# Altium PCB VTG-Ctrl.PcbDoc (part 2 of 2)
Units mm, origin at the board's own origin, x right, y up, seen from the top; angles counter-clockwise.
Board outline 101 x 82 mm, 12 copper layers (Top, Layer 1, Layer 2, Layer 3, Layer 4, Layer 5, Layer 6, Layer 7, Layer 8, Layer 9, Layer 10, Bottom), stack 1.92 mm thick; 171 components, 102 nets, 650 pads, 12 vias.
Unrouted connection lines stored in the file: 291.
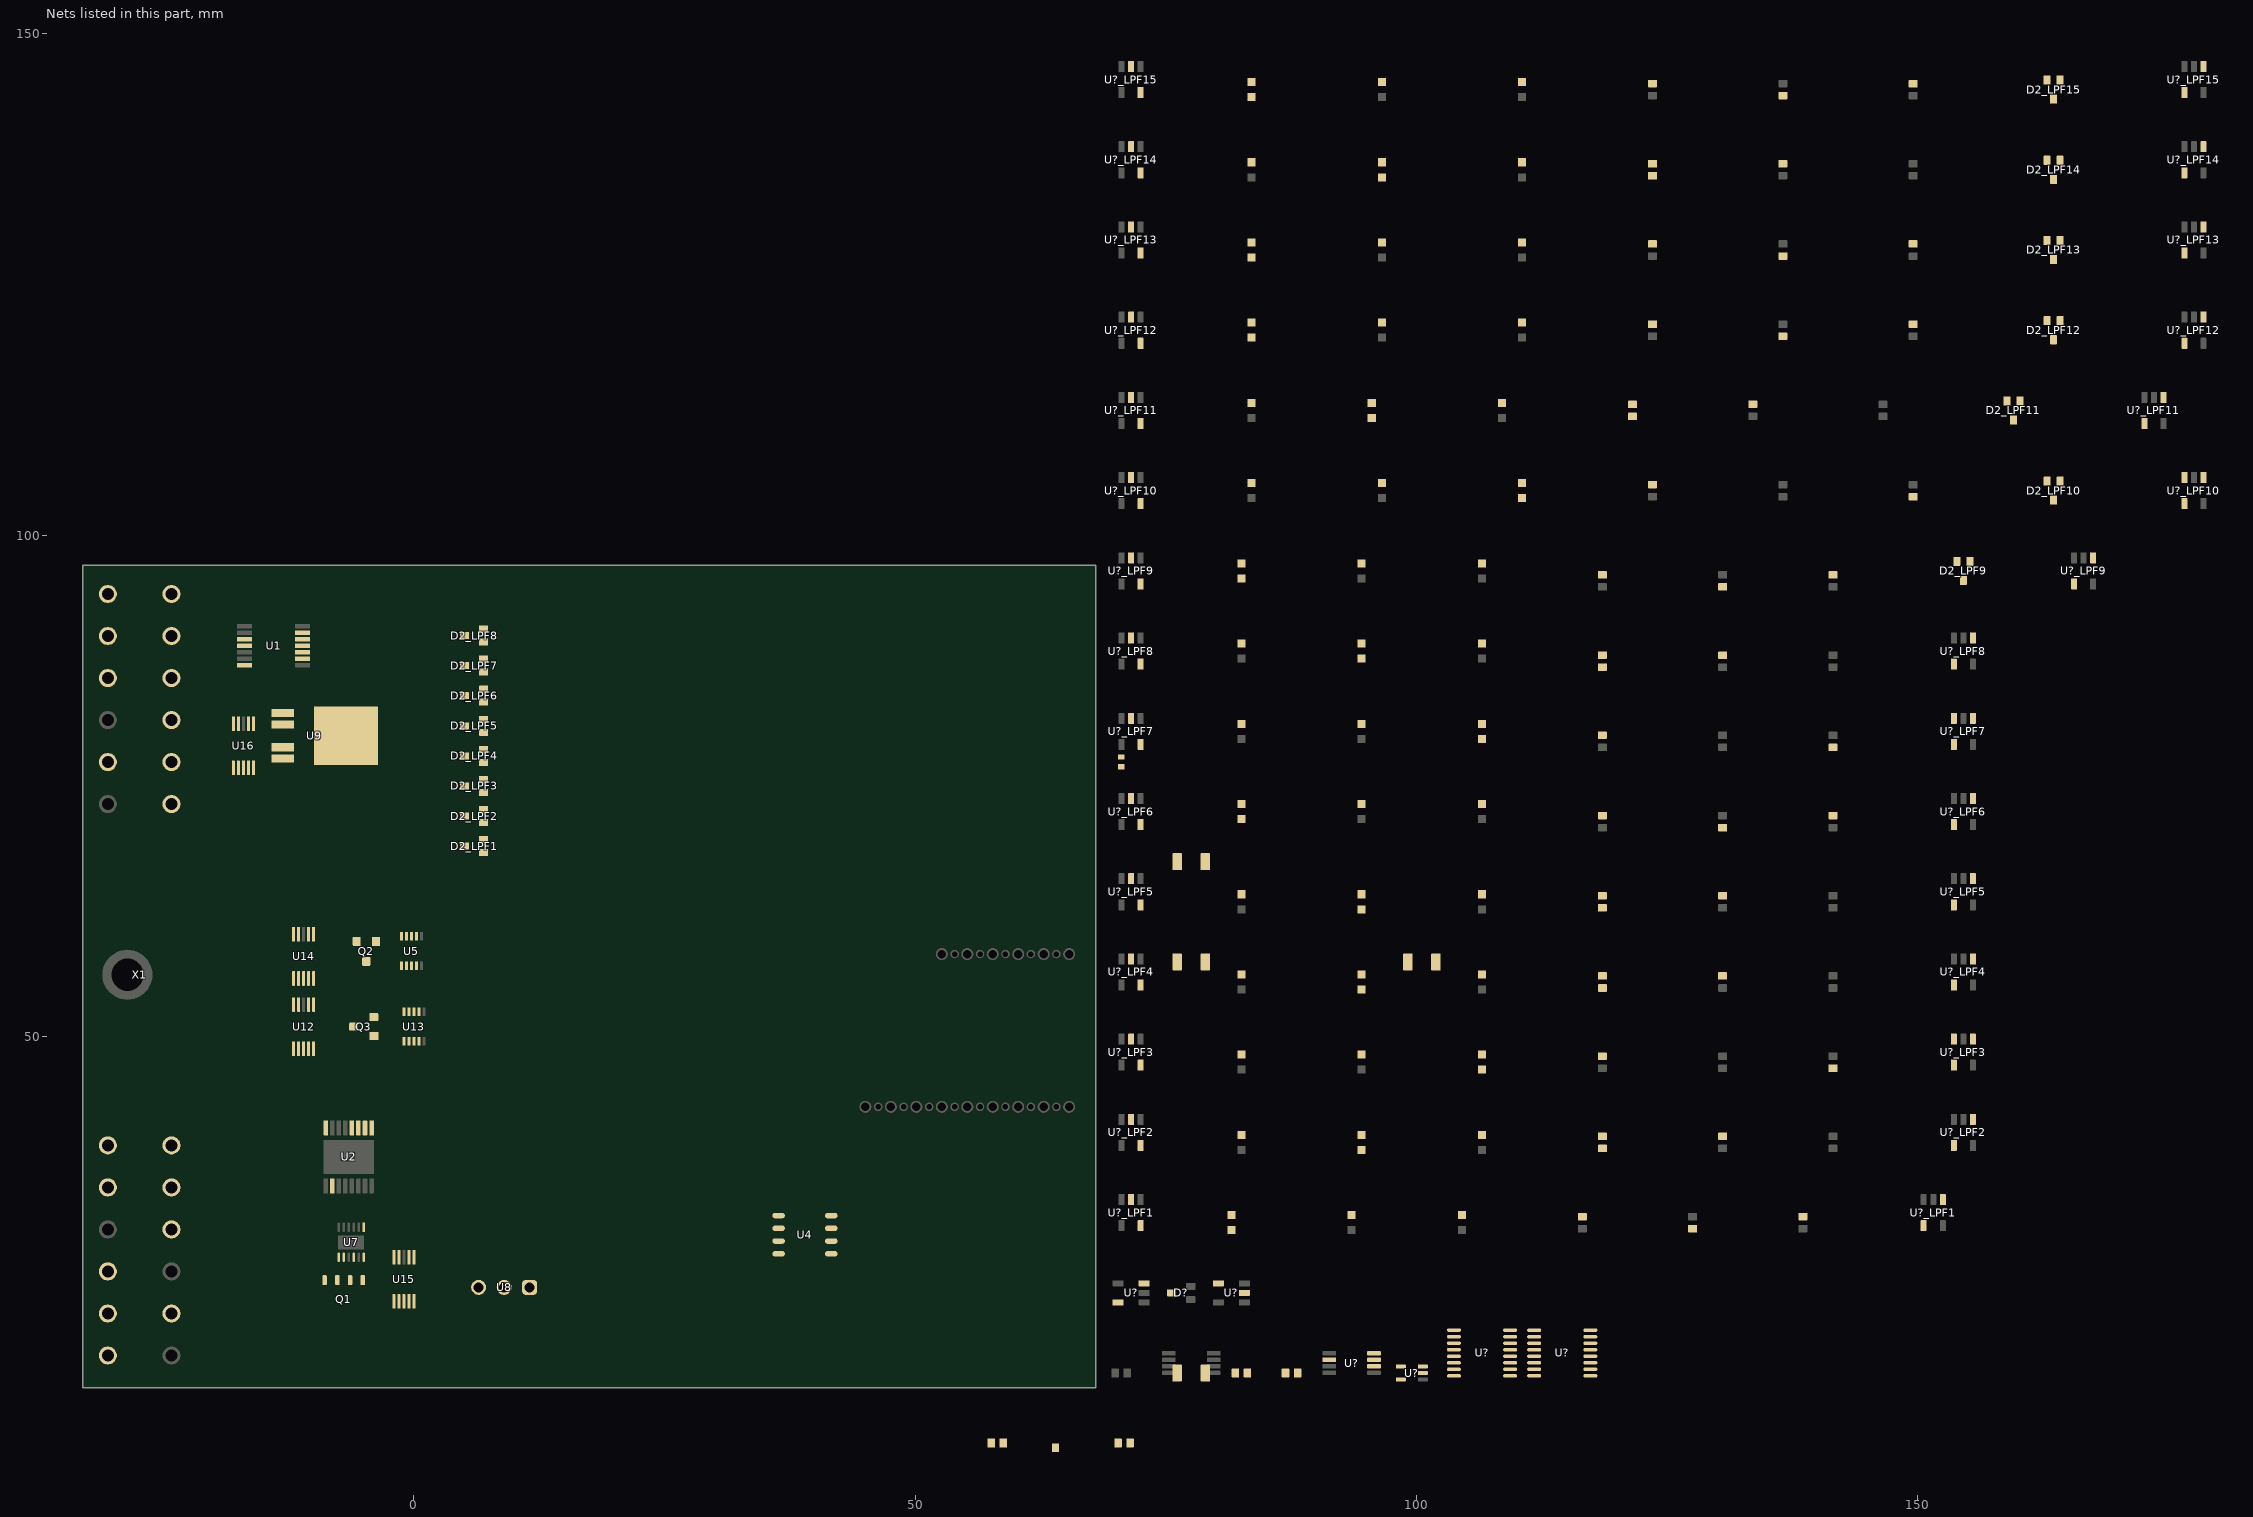
[diagram p2: the nets of this part, all layers, seen from the top]

## Part data
C?_LPF1 C?_LPF1 C?_LPF2 C?_LPF2 C?_LPF3 C?_LPF3 C?_LPF4 C?_LPF4 C?_LPF5 C?_LPF5 C?_LPF6 C?_LPF6 C?_LPF7 C?_LPF7 C?_LPF8 C?_LPF8 C?_LPF9 C?_LPF9 C?_LPF10 C?_LPF10 C?_LPF11 C?_LPF11 C?_LPF12 C?_LPF12 C?_LPF13 C?_LPF13 C?_LPF14 C?_LPF14 C?_LPF15 C?_LPF15: library part CMP-001-00738-4, "WCAP-CSGP Multilayer Ceramic Chip Capacitor, General Purpose, size 0603, X7R, 22nF, 25VDC", Capacitance Tolerance=+/-10%, Case/Package=0603, Insulation Resistance=10GO, Manufacturer="Wurth Elektronik", Operating Temperature Max=125°C, Operating Temperature Min=-55°C, Rated Voltage (DC)=25V, Category="Multilayer Ceramic Chip Capacitors", Ceramic Type=X7R, Component Type=Standard, ComponentLink1Description="Website Link", ComponentLink1URL=https://www.we-online.com/redexpert/article/885012206067?ad, ComponentLink2Description="Datasheet Link", ComponentLink2URL=https://www.we-online.com/redexpert/spec/885012206067?ad, Design Item ID=885012206067, Dissipation Factor=3.5%, Height=0.8mm, Length=1.6mm, Manufacturer Part Number=885012206067, Match Code=WCAP-CSGP, Mount="Surface Mount", Packaging="Tape and Reel", Pins=2, Source=WCAP-CSGP.SchLib, Technical Reference=X7R0603223K025DFCT10000, Width=0.8mm
C?_LPF1 C?_LPF2 C?_LPF3 C?_LPF4 C?_LPF5 C?_LPF6 C?_LPF7 C?_LPF8 C?_LPF9 C?_LPF10 C?_LPF11 C?_LPF12 C?_LPF13 C?_LPF14 C?_LPF15: library part CMP-001-00736-4, "WCAP-CSGP Multilayer Ceramic Chip Capacitor, General Purpose, size 0603, X7R, 10nF, 25VDC", Capacitance Tolerance=+/-10%, Case/Package=0603, Insulation Resistance=10GO, Manufacturer="Wurth Elektronik", Operating Temperature Max=125°C, Operating Temperature Min=-55°C, Rated Voltage (DC)=25V, Category="Multilayer Ceramic Chip Capacitors", Ceramic Type=X7R, Component Type=Standard, ComponentLink1Description="Website Link", ComponentLink1URL=https://www.we-online.com/redexpert/article/885012206065?ad, ComponentLink2Description="Datasheet Link", ComponentLink2URL=https://www.we-online.com/redexpert/spec/885012206065?ad, Design Item ID=885012206065, Dissipation Factor=3.5%, Height=0.8mm, Length=1.6mm, Manufacturer Part Number=885012206065, Match Code=WCAP-CSGP, Mount="Surface Mount", Packaging="Tape and Reel", Pins=2, Source=WCAP-CSGP.SchLib, Technical Reference=X7R0603103K025DFCT10000, Width=0.8mm
D1: library part CMP-004-00025-A01, "Vishay - 5A, 60V Schottky diode, DFN3820A, DO-220AA compatible", Case/Package=DFN3820A, Forward Current=5A, Forward Voltage=430mV, Operating Temperature (Max)=175°C, Operating Temperature (Min)=-40°C, Peak Reverse Voltage=60V, Mounting Technology=SMD, Pins=2, RoHS Compliant=Yes
D2_LPF1 D2_LPF2 D2_LPF3 D2_LPF4 D2_LPF5 D2_LPF6 D2_LPF7 D2_LPF8 D2_LPF9 D2_LPF10 D2_LPF11 D2_LPF12 D2_LPF13 D2_LPF14 D2_LPF15 D?: library part CMP-004-00031-7, "Rectifier Diode, Schottky, 2 Element, 0.2A, 30V V(RRM), Silicon", Case/Package=SOT-323, Forward Current=200mA, Forward Voltage=220mV, Operating Temperature (Max)=125°C, Operating Temperature (Min)=-55°C, Peak Reverse Voltage=30V, Mounting Technology=SMD, Pins=3, RoHS Compliant=Yes
J1: library part CMP-009-00061-4, Pins=2
MOD1: library part CMP-00060AA.R2, "ESP32-S3FN8, 8MB Flash, RGB LED", ComponentLink1Description="Product Page", ComponentLink1URL=https://docs.m5stack.com/en/core/Stamp-S3A, Processor=ESP32-S3FN8
Q1: library part CMP-013-00038-A01, "Mosfet, N-Ch, 100V, 30A, 175Deg C, 48W Rohs Compliant: Yes", Case/Package=SO8, Drain current=30A, Operating Temperature (Max)=175°C, Operating Temperature (Min)=-55°C, Mounting Technology=SMT, Nominal Vgs=4V, Pins=6, RoHS Compliant=Yes, Transistor Type="Dual NFET", Vds (Max)=100V, Vgs (Max)=10V
Q2 Q3: library part CMP-013-00040-A01, "Transistor: N-MOSFET; unipolar; 20V; 2.2A; 0, 09ohm; 0.66W; -55+150 st.C; SMD; SOT23", Case/Package=TO-236-3, Drain current=2.8A, Operating Temperature (Max)=150°C, Operating Temperature (Min)=-55°C, Mounting Technology="Surface Mount", Nominal Vgs=4.5V, Pins=3, RoHS Compliant=Yes, Transistor Type=NFET, Vds (Max)=20V, Vgs (Max)=12V
R1 R2 R? R? R? R?_LPF1 R?_LPF2 R?_LPF3 R?_LPF4 R?_LPF5 R?_LPF6 R?_LPF7 R?_LPF8 R?_LPF9 R?_LPF10 R?_LPF11 R?_LPF12 R?_LPF13 R?_LPF14 R?_LPF15: library part CMP-009-07799-A10, "RES SMD 10K OHM 1% 1/10W 0603 ±100ppm/°C", Case/Package=0603, Operating Temperature (Max)=125°C, Operating Temperature (Min)=-55°C, Power=100mW, Temperature Coefficient=±100ppm/°C, Tolerance=1%, Voltage Rating=75V, Mounting Technology=SMT, Pins=2, RoHS Compliant=Yes
R3 R4: library part CMP-009-10467-A07, "RES SMD 0.05 OHM 1% 1 1206 ±100ppm/°C", Case/Package=1206, Operating Temperature (Max)=125°C, Operating Temperature (Min)=-55°C, Power=1W, Temperature Coefficient=±100ppm/°C, Tolerance=1%, Voltage Rating=200V, Mounting Technology=SMT, Pins=2, RoHS Compliant=Yes
R5 R6: library part CMP-009-10450-A07, "RES SMD 0.01 OHM 1% 1 1206 ±200ppm/°C", Case/Package=1206, Operating Temperature (Max)=125°C, Operating Temperature (Min)=-55°C, Power=1W, Temperature Coefficient=±200ppm/°C, Tolerance=1%, Voltage Rating=200V, Mounting Technology=SMT, Pins=2, RoHS Compliant=Yes
R?_LPF1 R?_LPF1 R?_LPF2 R?_LPF2 R?_LPF3 R?_LPF3 R?_LPF4 R?_LPF4 R?_LPF5 R?_LPF5 R?_LPF6 R?_LPF6 R?_LPF7 R?_LPF7 R?_LPF8 R?_LPF8 R?_LPF9 R?_LPF9 R?_LPF10 R?_LPF10 R?_LPF11 R?_LPF11 R?_LPF12 R?_LPF12 R?_LPF13 R?_LPF13 R?_LPF14 R?_LPF14 R?_LPF15 R?_LPF15: library part CMP-009-08189-A11, "RES SMD 47K OHM 1% 1/10W 0603 ±100ppm/°C", Case/Package=0603, Operating Temperature (Max)=125°C, Operating Temperature (Min)=-55°C, Power=100mW, Temperature Coefficient=±100ppm/°C, Tolerance=1%, Voltage Rating=75V, Mounting Technology=SMT, Pins=2, RoHS Compliant=Yes
U1: library part CMP-015-00035-A01, "Sensor Interface Precision Thermocouple to Digital Converter with Linearization", Case/Package=TSSOP, Operating Temperature (Max)=125°C, Operating Temperature (Min)=-55°C, Samples Frequency=10Hz, Supply Voltage (Max)=3.6V, Supply Voltage (Min)=3.3V, Interface=SPI, Mounting Technology="Surface Mount", Pins=14, RoHS Compliant=Yes, Sample Resolution=19, Signal Type=Differential
U2: library part CMP-00024-00019-A02, "40-V, 6-A H-bridge motor driver with integrated current sensing feedback 16-HTSSOP -40 to 125", Case/Package=HTSSOP16, Operating Temperature (Max)=125°C, Operating Temperature (Min)=-40°C, Sink Current (Max)=-6A, Source Current (Max)=6A, Supply Voltage (Max)=37V, Supply Voltage (Min)=4.5V, Working Voltage=5V, Mounting Technology=SMT, Pins=16, RoHS Compliant=16
U4: library part CMP-031-00023-A02, "Interface Circuit, 1-Trnsvr, PDSO8", Case/Package=SOP, Max Operating Temperature=125°C, Max Supply Current=70uA, Min Operating Temperature=-40°C, Nominal Supply Voltage=5V, Package Body Material=Plastic, Package Equivalence Code=SOP8,.25, Package Shape=Rectangular, Package Style="SMALL OUTLINEMeter", Temperature Grade=AUTOMOTIVE, Channels=1, Data Rate=1000Mbps, Height - Seated (Max)=1.75mm, JESD-30 Code=R-PDSO-G8, JESD-609 Code=e4, Length=4.9mm, Moisture Sensitivity Level=1, Number of Transceivers=1, Pins=8, Power Supplies=5V, Qualification Status="Not Qualified", Reach SVHC Compliant=Yes, RoHS Compliant=Yes, Surface Mount=Yes, Telecom IC Type="CAN TRANSCEIVER", Terminal Finish=Nickel, Terminal Form="Gull Wing", Terminal Pitch=1.27mm, Terminal Position=DUAL, Width=3.9mm
U5 U13: library part CMP-00024-00021-A01, "Hot-Swap Ctrl, Wson-10, -40 To 85Deg C Rohs Compliant: Yes", Case/Package=WSON10, Operating Temperature (Max)=150°C, Operating Temperature (Min)=-55°C, Source Current (Max)=5A, Supply Voltage (Max)=18V, Supply Voltage (Min)=4.4V, Mounting Technology=SMT, Pins=10, RoHS Compliant=Yes
U7: library part CMP-019-00082-A01, "AUTOMOTIVE IDEAL DIODE CONTROLLE OR Controller N+1 ORing Controller N-Channel 1: 1 12-WSON (3x3)", Case/Package=WSON12, Input Voltage (Max)=65V, Input Voltage (Min)=3V, Manufacturer Lifecycle Status=ACTIVE, Max Junction Temperature (Tj)=150°C, Operating Temperature (Max)=125°C, Operating Temperature (Min)=-40°C, Enable=yes, Height=800µm, Length=3mm, Number of Outputs=1, Pins=12, RoHS=Compliant, Thickness=750µm, Width=3mm
U8: library part CMP-019-00019-A05, "WPME-FDSM Fixed Step Down Regulator Module, THT, SIP-3, 8-36Vin, 5Vout, 1Aout", Case/Package=SIP-3, Input Voltage (Max)=36V, Input Voltage (Min)=8V, Operating Temperature (Max)=85°C, Operating Temperature (Min)=-40°C, Output Current (Continuous)=1A, Output Voltage (Max)=5V, Category="Step Down Converter", Component Type=Standard, ComponentLink1Description="Website Link", ComponentLink1URL=https://www.we-online.com/redexpert/article/173010535?ad, ComponentLink2Description="Datasheet Link", ComponentLink2URL=https://www.we-online.com/redexpert/spec/173010535?ad, Design Item ID=173010535, Height=10.4mm, Length=11.6mm, Match Code=WPME-FDSM, Mount="Through Hole", Packaging=Tube, Pins=3, Source=WPME-FDSM.SchLib, Width=8mm
U9: library part CMP-00196-84309267-1, "BTS452RAKSA1 Power Load Sw, High Side, -40 To 150Degc Rohs Compliant: Yes", Max Junction Temperature (Tj)=150°C, Max Power Dissipation=41.6W, Max Supply Voltage=52V, Min Operating Temperature=-40°C, Min Supply Voltage=6V, Nominal Supply Current=800µA, Output Current=1.8A, Height=2.5mm, Max Operating Temperature=150°C, NexarPartId=84309267, Number of Outputs=1
U12 U14 U15 U16: library part CMP-015-00037-A01, "SP Amp Current Shunt and Power Monitor Dual 5.5V 10-Pin VSSOP T/R", Case/Package=VSSOP, Operating Temperature (Max)=125°C, Operating Temperature (Min)=-40°C, Samples Frequency=500kHz, Supply Voltage (Max)=5.5V, Supply Voltage (Min)=2.7V, Interface=I2C, Mounting Technology="Surface Mount", Pins=10, RoHS Compliant=Yes, Sample Resolution=16, Signal Type=Differential
U? U?: library part CMP-0367-00268-2, "Low Noise, Very Low Drift, Precision Voltage Reference, -40 to 125 degC, 8-pin MSOP (DGK), Green (RoHS & no Sb/Br)", Manufacturer="Texas Instruments", Rating=Catalog, Temp Coeff(Max)(ppm/ degree C)=3, Code_JEDEC=MO-187, ComponentLink1Description="Manufacturer URL", ComponentLink1URL=http://www.ti.com/, ComponentLink2Description=Datasheet, ComponentLink2URL=http://www.ti.com/general/docs/lit/getliterature.tsp?genericPartNumber=REF5040&fileType=pdf, ComponentLink3Description="Package Specification", ComponentLink3URL=http://www.ti.com/litv/pdf/mpds028d, DatasheetVersion=SBOS410E, Eco-Plan="Green (RoHS & no Sb/Br)", Initial Accuracy @ 25/deg C(%)=0.05, Iout/Iz(Max)(mA)=10, Iq(Max)(uA)=1000, Mounting Technology="Surface Mount", PackageDescription="8-Pin Thin Small Outline Package 3 x 3 mm Body ,0.65 mm Pitch", PackageReference=DGK0008A, PackageVersion=4073329/E, PartNumber=REF5040AIDGKT, SubFamily="Series Voltage Reference", VI(Max)(V)=18, VI(Min)(V)=4.296, VO(V)=4.096
U? U?: library part CMP-0054-00500-3, "8-Channel, 200 to 500 kSPS, 12-Bit ADC, -40 to 125 degC, 16-pin SOP (PW16), Green (RoHS & no Sb/Br)", Analog Voltage AV/DD(Max)(V)=5.25, Analog Voltage AV/DD(Min)(V)=2.7, Manufacturer="Texas Instruments", # Input Channels=8, Architecture=SAR, Code_JEDEC=MO-153, ComponentLink1Description="Manufacturer URL", ComponentLink1URL=http://www.ti.com/, ComponentLink2Description=Datasheet, ComponentLink2URL=http://www.ti.com/lit/ds/symlink/adc128s052-q1.pdf, ComponentLink3Description="Package Specification", ComponentLink3URL=http://www.ti.com/lit/ml/mpds361/mpds361.pdf, DatasheetVersion=SNAS333D, Digital Supply(Max)(V)=5.25, Digital Supply(Min)(V)=2.7, Eco-Plan="Green (RoHS & no Sb/Br)", ENOB(Bits)=11.8, INL(Max)(+/-LSB)=1, Interface="Serial SPI, QSPI, Microwire (Serial I/O)", Mounting Technology="Surface Mount", PackageDescription="16-Pin Plastic Small Outline, Body 5 x 4.4 mm, Pitch 0.65 mm", PackageReference=PW16, PackageVersion="4040064-4/G, 02/2011", PartNumber=ADC128S052QCMT/NOPB, Resolution(Bits)=12, Sample Rate(max)(SPS)=500k, SFDR(dB)=92, SINAD(dB)=73, SNR(dB)=73, SubFamily="Precision ADC (<=10MSPS)"
U?: library part CMP-014-00003-6, "Operational Amplifier, 1 Func, 1500uV Offset-Max, CMOS, PDSO5", Case/Package=SOT-SC70, Frequency=1MHz, Max Operating Temperature=125°C, Max Supply Voltage=5.5V, Min Operating Temperature=-40°C, Min Supply Voltage=1.8V, Nominal Supply Voltage=5V, Channels=1, Mounting Technology=SMT, Output Type=CMOS, Pins=5, RoHS Compliant=Yes
U? U?: library part CMP-016-00026-A01, "Single 1.65-V to 5.5-V buffer with Schmitt-Trigger inputs 5-SOT-23 -40 to 125", Case/Package=SOT-23, Operating Temperature (Max)=125°C, Operating Temperature (Min)=-55°C, Supply Voltage (Max)=5.5V, Supply Voltage (Min)=1.8V, Logic Type="Buffer /w Schmitt Trigger", Mounting Technology="Surface Mount", Pins=5, Propagation Delay (Max)=5.5ns, RoHS Compliant=Yes
U?_LPF1 U?_LPF1 U?_LPF2 U?_LPF2 U?_LPF3 U?_LPF3 U?_LPF4 U?_LPF4 U?_LPF5 U?_LPF5 U?_LPF6 U?_LPF6 U?_LPF7 U?_LPF7 U?_LPF8 U?_LPF8 U?_LPF9 U?_LPF9 U?_LPF10 U?_LPF10 U?_LPF11 U?_LPF11 U?_LPF12 U?_LPF12 U?_LPF13 U?_LPF13 U?_LPF14 U?_LPF14 U?_LPF15 U?_LPF15: library part CMP-014-00026-A01, Case/Package=SOT23-5, Frequency=4.3MHz, Operating Temperature (Max)=125°C, Operating Temperature (Min)=-40°C, Supply Voltage (Max)=5.5V, Supply Voltage (Min)=2.7V, Supply Voltage (Nom)=5V, Channels=1, Mounting Technology=SMT, Nominal Gain Bandwidth Product=4.3Hz, Output Type=R2R, Pins=5, RoHS Compliant=Yes
X1: library part CMP-005-000001-3, Component Type=Standard, Design Item ID=DTM13.24P, Pin Count=25, Source=Deutsch.SchLib

## Via types
v1: diameter 0.5, hole 0.2, Top to Bottom, 12 vias

## Nets (pads, with @x,y where several pads share a name; then routed paths per layer and width w, separated by ;. In a path a pad name is that pad's centre, name@x,y a point inside that pad or via, vN(x,y) a via of type N, cw(c..) or ccw(c..) an arc to the next point about the centre after c; other vN are vias at no path point)
3V3: R2.2 U4.5 U12.2 U12.6 U14.6 U15.6 U16.6 U?.5@70.225,23.5 U?.13
5V: U4.3 U8.3 U?.2@95.75,17.125
5V_Sens1: R3.2 U12.10 X1.1.12
5V_Sens2: R4.2 U14.10 X1.2.12
12V: R1.1 R5.2 U8.1 U9.6 U15.10
+5V: D2_LPF1.2 D2_LPF2.2 D2_LPF3.2 D2_LPF4.2 D2_LPF5.2 D2_LPF6.2 D2_LPF7.2 D2_LPF8.2 D2_LPF9.2 D2_LPF10.2 D2_LPF11.2 D2_LPF12.2 D2_LPF13.2 D2_LPF14.2 D2_LPF15.2 U?_LPF1.5@72.475,31.15 U?_LPF2.5@72.475,39.15 U?_LPF3.5@72.475,47.15 U?_LPF4.5@72.475,55.15 U?_LPF5.5@72.475,63.15 U?_LPF6.5@72.475,71.15 U?_LPF7.5@72.475,79.15 U?_LPF8.5@72.475,87.15 U?_LPF9.5@72.475,95.15 U?_LPF10.5@72.475,103.15 U?_LPF11.5@72.475,111.15 U?_LPF12.5@72.475,119.15 U?_LPF13.5@72.475,128.15 U?_LPF14.5@72.475,136.15 U?_LPF15.5@72.475,144.15
ADCIN0: C?_LPF1.1@81.525,32.2 U?.4@117.325,18.125 U?_LPF1.1@152.475,33.75 U?_LPF1.4@150.575,31.15
ADCIN1: C?_LPF2.1@82.525,40.2 U?.5@117.325,18.775 U?_LPF2.1@155.475,41.75 U?_LPF2.4@153.575,39.15
ADCIN2: C?_LPF3.1@82.525,48.2 U?.6@117.325,19.425 U?_LPF3.1@155.475,49.75 U?_LPF3.4@153.575,47.15
ADCIN3: C?_LPF4.1@82.525,56.2 U?.7@117.325,20.075 U?_LPF4.1@155.475,57.75 U?_LPF4.4@153.575,55.15
ADCIN4: C?_LPF5.1@82.525,64.2 U?.8@117.325,20.725 U?_LPF5.1@155.475,65.75 U?_LPF5.4@153.575,63.15
ADCIN5: C?_LPF6.1@82.525,73.2 U?.9@111.725,20.725 U?_LPF6.1@155.475,73.75 U?_LPF6.4@153.575,71.15
ADCIN6: C?_LPF7.1@82.525,81.2 U?.10@111.725,20.075 U?_LPF7.1@155.475,81.75 U?_LPF7.4@153.575,79.15
ADCIN7: C?_LPF8.1@82.525,89.2 U?.11@111.725,19.425 U?_LPF8.1@155.475,89.75 U?_LPF8.4@153.575,87.15
ADCIN8: C?_LPF9.1@82.525,97.2 U?.4@109.325,18.125 U?_LPF9.1@167.475,97.75 U?_LPF9.4@165.575,95.15
ADCIN9: C?_LPF10.1@83.525,105.2 U?.5@109.325,18.775 U?_LPF10.1@178.475,105.75 U?_LPF10.4@176.575,103.15
ADCIN10: C?_LPF11.1@83.525,113.2 U?.6@109.325,19.425 U?_LPF11.1@174.475,113.75 U?_LPF11.4@172.575,111.15
ADCIN11: C?_LPF12.1@83.525,121.2 U?.7@109.325,20.075 U?_LPF12.1@178.475,121.75 U?_LPF12.4@176.575,119.15
ADCIN12: C?_LPF13.1@83.525,129.2 U?.8@109.325,20.725 U?_LPF13.1@178.475,130.75 U?_LPF13.4@176.575,128.15
ADCIN13: C?_LPF14.1@83.525,137.2 U?.9@103.725,20.725 U?_LPF14.1@178.475,138.75 U?_LPF14.4@176.575,136.15
ADCIN14: C?_LPF15.1@83.525,145.2 U?.10@103.725,20.075 U?_LPF15.1@178.475,146.75 U?_LPF15.4@176.575,144.15
ADCIN15: R?.1@88.125,16.45 U?.4@98.425,17.1 U?.11@103.725,19.425
AGND: U?.3@109.325,17.475 U?.3@117.325,17.475
AIN0: D2_LPF1.3 R?_LPF1.1@116.525,32.05 X1.2.5
AIN1: D2_LPF2.3 R?_LPF2.1@118.525,40.05 X1.1.2
AIN2: D2_LPF3.3 R?_LPF3.1@118.525,48.05 X1.1.7
AIN3: D2_LPF4.3 J1.2 R?_LPF4.1@118.525,56.05 X1.1.10
AIN4: D2_LPF5.3 R?_LPF5.1@118.525,64.05 X1.1.5
AIN5: D2_LPF6.3 R?_LPF6.1@118.525,72.05 X1.1.9
AIN6: D2_LPF7.3 R?_LPF7.1@118.525,80.05
AIN7: D2_LPF8.3 R?_LPF8.1@118.525,88.05
AIN8: D2_LPF9.3 R?_LPF9.1@118.525,96.05
AIN9: D2_LPF10.3 R?_LPF10.1@123.525,105.05
AIN10: D2_LPF11.3 R?_LPF11.1@121.525,113.05
AIN11: D2_LPF12.3 R?_LPF12.1@123.525,121.05
AIN12: D2_LPF13.3 R?_LPF13.1@123.525,129.05
AIN13: D2_LPF14.3 R?_LPF14.1@123.525,137.05
AIN14: D2_LPF15.3 R?_LPF15.1@123.525,145.05
CAN.CANH: U4.7
CAN.CANL: U4.6
CANrx: U4.4
CANtx: U4.1
EN_EF5.1: U5.3 U5.4 U5.5 U13.3 U13.4 U13.5
EN_OUT1: U9.2
f_turbo: X1.2.11
GND: C?_LPF1.1@93.525,32.2 C?_LPF1.1@104.525,32.2 C?_LPF2.1@94.525,40.2 C?_LPF2.1@106.525,40.2 C?_LPF3.1@94.525,48.2 C?_LPF3.1@106.525,48.2 C?_LPF4.1@94.525,56.2 C?_LPF4.1@106.525,56.2 C?_LPF5.1@94.525,64.2 C?_LPF5.1@106.525,64.2 C?_LPF6.1@94.525,73.2 C?_LPF6.1@106.525,73.2 C?_LPF7.1@94.525,81.2 C?_LPF7.1@106.525,81.2 C?_LPF8.1@94.525,89.2 C?_LPF8.1@106.525,89.2 C?_LPF9.1@94.525,97.2 C?_LPF9.1@106.525,97.2 C?_LPF10.1@96.525,105.2 C?_LPF10.1@110.525,105.2 C?_LPF11.1@95.525,113.2 C?_LPF11.1@108.525,113.2 C?_LPF12.1@96.525,121.2 C?_LPF12.1@110.525,121.2 C?_LPF13.1@96.525,129.2 C?_LPF13.1@110.525,129.2 C?_LPF14.1@96.525,137.2 C?_LPF14.1@110.525,137.2 C?_LPF15.1@96.525,145.2 C?_LPF15.1@110.525,145.2 D1.2 D2_LPF1.1 D2_LPF2.1 D2_LPF3.1 D2_LPF4.1 D2_LPF5.1 D2_LPF6.1 D2_LPF7.1 D2_LPF8.1 D2_LPF9.1 D2_LPF10.1 D2_LPF11.1 D2_LPF12.1 D2_LPF13.1 D2_LPF14.1 D2_LPF15.1 R?.1@83.125,16.45 U4.2 U4.8 U7.7 U8.2 U9.1 U12.1 U12.7 U14.1 U14.7 U15.1 U15.7 U16.1 U16.2 U16.7 U?.2@100.625,16.45 U?.3@72.825,25.4 U?.4@95.75,18.425 U?.12 U?_LPF1.2@71.525,33.75 U?_LPF2.2@71.525,41.75 U?_LPF3.2@71.525,49.75 U?_LPF4.2@71.525,57.75 U?_LPF5.2@71.525,65.75 U?_LPF6.2@71.525,73.75 U?_LPF7.2@71.525,81.75 U?_LPF8.2@71.525,89.75 U?_LPF9.2@71.525,97.75 U?_LPF10.2@71.525,105.75 U?_LPF11.2@71.525,113.75 U?_LPF12.2@71.525,121.75 U?_LPF13.2@71.525,130.75 U?_LPF14.2@71.525,138.75 U?_LPF15.2@71.525,146.75 X1.2.1
I2C.SCL: U12.5 U14.5 U15.2 U15.5 U16.5
I2C.SDA: U12.4 U14.2 U14.4 U15.4 U16.4
Mot+: U2.8
Mot-: U2.10 X1.2.2
Mot.DIR: U2.2
Mot.nFAULT: U2.4
Mot.nSLEEP: U2.3
Mot.PWM: U2.1
NetC?_LPF1_2: C?_LPF1.2@81.525,30.7 R?_LPF1.1@138.525,32.05 R?_LPF1.2@127.525,30.85
NetC?_LPF2_2: C?_LPF2.2@94.525,38.7 R?_LPF2.1@130.525,40.05 R?_LPF2.2@118.525,38.85
NetC?_LPF3_2: C?_LPF3.2@106.525,46.7 R?_LPF3.2@141.525,46.85 U?_LPF3.3@153.575,49.75
NetC?_LPF4_2: C?_LPF4.2@94.525,54.7 R?_LPF4.1@130.525,56.05 R?_LPF4.2@118.525,54.85
NetC?_LPF5_2: C?_LPF5.2@94.525,62.7 R?_LPF5.1@130.525,64.05 R?_LPF5.2@118.525,62.85
NetC?_LPF6_2: C?_LPF6.2@82.525,71.7 R?_LPF6.1@141.525,72.05 R?_LPF6.2@130.525,70.85
NetC?_LPF7_2: C?_LPF7.2@106.525,79.7 R?_LPF7.2@141.525,78.85 U?_LPF7.3@153.575,81.75
NetC?_LPF8_2: C?_LPF8.2@94.525,87.7 R?_LPF8.1@130.525,88.05 R?_LPF8.2@118.525,86.85
NetC?_LPF9_2: C?_LPF9.2@82.525,95.7 R?_LPF9.1@141.525,96.05 R?_LPF9.2@130.525,94.85
NetC?_LPF10_2: C?_LPF10.2@110.525,103.7 R?_LPF10.2@149.525,103.85 U?_LPF10.3@176.575,105.75
NetC?_LPF11_2: C?_LPF11.2@95.525,111.7 R?_LPF11.1@133.525,113.05 R?_LPF11.2@121.525,111.85
NetC?_LPF12_2: C?_LPF12.2@83.525,119.7 R?_LPF12.1@149.525,121.05 R?_LPF12.2@136.525,119.85
NetC?_LPF13_2: C?_LPF13.2@83.525,127.7 R?_LPF13.1@149.525,129.05 R?_LPF13.2@136.525,127.85
NetC?_LPF14_2: C?_LPF14.2@96.525,135.7 R?_LPF14.1@136.525,137.05 R?_LPF14.2@123.525,135.85
NetC?_LPF15_2: C?_LPF15.2@83.525,143.7 R?_LPF15.1@149.525,145.05 R?_LPF15.2@136.525,143.85
NetD?_3: D?.3 U?.2@82.825,24.45
NetQ1_1: Q1.1 R5.1 U15.8 U15.9
NetQ1_2: Q1.2 U7.8
NetQ1_4: Q1.4 U7.1
NetQ1_5: Q1.5 Q1.6 U7.10 U7.12
NetQ2_1: Q2.1 U5.9
NetQ2_2: Q2.2 U5.6 U5.7 U5.8
NetQ2_3: Q2.3 R3.1 U12.8 U12.9
NetQ3_1: Q3.1 U13.9
NetQ3_2: Q3.2 U13.6 U13.7 U13.8
NetQ3_3: Q3.3 R4.1 U14.8 U14.9
NetR?_2: R?.2@81.925,16.45 R?.2@86.925,16.45 U?.3@100.625,17.1
NetU5_2: U5.2
NetU13_2: U13.2
NetU?_4: U?.4@80.225,25.4
NetX1_1.4: X1.1.4
NetX1_2.3: X1.2.3
NetX1_2.8: X1.2.8
NetX1_2.9: X1.2.9
Out1: D1.1 R1.2 R6.1 R6.2 U9.5 U16.8 U16.9 U16.10 X1.1.8
REF4096: U?.2@109.325,16.825 U?.2@117.325,16.825 U?.5@98.425,15.8 U?.6@91.3,17.775
REFTEMP: U?.3@95.75,17.775
SPI.CS1: U1.9 U?.1@117.325,16.175
SPI.CS2: U?.1@109.325,16.175
SPI.MISO: U1.11 U?.15
SPI.MOSI: U1.12 U?.14
SPI.SCK: U1.10 U?.16
ST_OUT1: R2.1 U9.4
TC+: J1.1 U1.4 X1.1.11
TC-: U1.3 X1.1.6
TC_FLT: U1.13
TC_RDY: U1.7
Ub: Q1.3 X1.2.7
pads on no net: C?_LPF1.2@93.525,30.7 C?_LPF1.2@104.525,30.7 C?_LPF2.2@82.525,38.7 C?_LPF2.2@106.525,38.7 C?_LPF3.2@82.525,46.7 C?_LPF3.2@94.525,46.7 C?_LPF4.2@82.525,54.7 C?_LPF4.2@106.525,54.7 C?_LPF5.2@82.525,62.7 C?_LPF5.2@106.525,62.7 C?_LPF6.2@94.525,71.7 C?_LPF6.2@106.525,71.7 C?_LPF7.2@82.525,79.7 C?_LPF7.2@94.525,79.7 C?_LPF8.2@82.525,87.7 C?_LPF8.2@106.525,87.7 C?_LPF9.2@94.525,95.7 C?_LPF9.2@106.525,95.7 C?_LPF10.2@83.525,103.7 C?_LPF10.2@96.525,103.7 C?_LPF11.2@83.525,111.7 C?_LPF11.2@108.525,111.7 C?_LPF12.2@96.525,119.7 C?_LPF12.2@110.525,119.7 C?_LPF13.2@96.525,127.7 C?_LPF13.2@110.525,127.7 C?_LPF14.2@83.525,135.7 C?_LPF14.2@110.525,135.7 C?_LPF15.2@96.525,143.7 C?_LPF15.2@110.525,143.7 D?.1 D?.2 MOD1.1 MOD1.2 MOD1.3 MOD1.4 MOD1.5 MOD1.6 MOD1.7 MOD1.8 MOD1.9 MOD1.10 MOD1.11 MOD1.12 MOD1.13 MOD1.14 MOD1.15 MOD1.16 MOD1.17 MOD1.18 MOD1.19 MOD1.20 MOD1.21 MOD1.22 MOD1.23 MOD1.24 MOD1.25 MOD1.26 MOD1.27 MOD1.28 R?.1@71.125,16.45 R?.2@69.925,16.45 R?_LPF1.1@127.525,32.05 R?_LPF1.2@116.525,30.85 R?_LPF1.2@138.525,30.85 R?_LPF2.1@141.525,40.05 R?_LPF2.2@130.525,38.85 R?_LPF2.2@141.525,38.85 R?_LPF3.1@130.525,48.05 R?_LPF3.1@141.525,48.05 R?_LPF3.2@118.525,46.85 R?_LPF3.2@130.525,46.85 R?_LPF4.1@141.525,56.05 R?_LPF4.2@130.525,54.85 R?_LPF4.2@141.525,54.85 R?_LPF5.1@141.525,64.05 R?_LPF5.2@130.525,62.85 R?_LPF5.2@141.525,62.85 R?_LPF6.1@130.525,72.05 R?_LPF6.2@118.525,70.85 R?_LPF6.2@141.525,70.85 R?_LPF7.1@130.525,80.05 R?_LPF7.1@141.525,80.05 R?_LPF7.2@118.525,78.85 R?_LPF7.2@130.525,78.85 R?_LPF8.1@141.525,88.05 R?_LPF8.2@130.525,86.85 R?_LPF8.2@141.525,86.85 R?_LPF9.1@130.525,96.05 R?_LPF9.2@118.525,94.85 R?_LPF9.2@141.525,94.85 R?_LPF10.1@136.525,105.05 R?_LPF10.1@149.525,105.05 R?_LPF10.2@123.525,103.85 R?_LPF10.2@136.525,103.85 R?_LPF11.1@146.525,113.05 R?_LPF11.2@133.525,111.85 R?_LPF11.2@146.525,111.85 R?_LPF12.1@136.525,121.05 R?_LPF12.2@123.525,119.85 R?_LPF12.2@149.525,119.85 R?_LPF13.1@136.525,129.05 R?_LPF13.2@123.525,127.85 R?_LPF13.2@149.525,127.85 R?_LPF14.1@149.525,137.05 R?_LPF14.2@136.525,135.85 R?_LPF14.2@149.525,135.85 R?_LPF15.1@136.525,145.05 R?_LPF15.2@123.525,143.85 R?_LPF15.2@149.525,143.85 U1.1 U1.2 U1.5 U1.6 U1.8 U1.14 U2.5 U2.6 U2.7 U2.9 U2.11 U2.12 U2.13 U2.14 U2.15 U2.16 U2.17 U5.1 U5.10 U5.EP U7.2 U7.3 U7.4 U7.5 U7.6 U7.9 U7.11 U7.13 U12.3 U13.1 U13.10 U13.EP U14.3 U15.3 U16.3 U?.1@72.825,23.5 U?.1@79.75,16.475 U?.1@82.825,23.5 U?.1@95.75,16.475 U?.1@100.625,15.8 U?.2@72.825,24.45 U?.2@79.75,17.125 U?.3@79.75,17.775 U?.3@82.825,25.4 U?.4@70.225,25.4 U?.4@79.75,18.425 U?.5@75.3,18.425 U?.5@80.225,23.5 U?.5@91.3,18.425 U?.6@75.3,17.775 U?.7@75.3,17.125 U?.7@91.3,17.125 U?.8@75.3,16.475 U?.8@91.3,16.475 U?_LPF1.1@72.475,33.75 U?_LPF1.2@151.525,33.75 U?_LPF1.3 U?_LPF1.4@70.575,31.15 U?_LPF1.5@152.475,31.15 U?_LPF2.1@72.475,41.75 U?_LPF2.2@154.525,41.75 U?_LPF2.3 U?_LPF2.4@70.575,39.15 U?_LPF2.5@155.475,39.15 U?_LPF3.1@72.475,49.75 U?_LPF3.2@154.525,49.75 U?_LPF3.3@70.575,49.75 U?_LPF3.4@70.575,47.15 U?_LPF3.5@155.475,47.15 U?_LPF4.1@72.475,57.75 U?_LPF4.2@154.525,57.75 U?_LPF4.3 U?_LPF4.4@70.575,55.15 U?_LPF4.5@155.475,55.15 U?_LPF5.1@72.475,65.75 U?_LPF5.2@154.525,65.75 U?_LPF5.3 U?_LPF5.4@70.575,63.15 U?_LPF5.5@155.475,63.15 U?_LPF6.1@72.475,73.75 U?_LPF6.2@154.525,73.75 U?_LPF6.3 U?_LPF6.4@70.575,71.15 U?_LPF6.5@155.475,71.15 U?_LPF7.1@72.475,81.75 U?_LPF7.2@154.525,81.75 U?_LPF7.3@70.575,81.75 U?_LPF7.4@70.575,79.15 U?_LPF7.5@155.475,79.15 U?_LPF8.1@72.475,89.75 U?_LPF8.2@154.525,89.75 U?_LPF8.3 U?_LPF8.4@70.575,87.15 U?_LPF8.5@155.475,87.15 U?_LPF9.1@72.475,97.75 U?_LPF9.2@166.525,97.75 U?_LPF9.3 U?_LPF9.4@70.575,95.15 U?_LPF9.5@167.475,95.15 U?_LPF10.1@72.475,105.75 U?_LPF10.2@177.525,105.75 U?_LPF10.3@70.575,105.75 U?_LPF10.4@70.575,103.15 U?_LPF10.5@178.475,103.15 U?_LPF11.1@72.475,113.75 U?_LPF11.2@173.525,113.75 U?_LPF11.3 U?_LPF11.4@70.575,111.15 U?_LPF11.5@174.475,111.15 U?_LPF12.1@72.475,121.75 U?_LPF12.2@177.525,121.75 U?_LPF12.3 U?_LPF12.4@70.575,119.15 U?_LPF12.5@178.475,119.15 U?_LPF13.1@72.475,130.75 U?_LPF13.2@177.525,130.75 U?_LPF13.3 U?_LPF13.4@70.575,128.15 U?_LPF13.5@178.475,128.15 U?_LPF14.1@72.475,138.75 U?_LPF14.2@177.525,138.75 U?_LPF14.3 U?_LPF14.4@70.575,136.15 U?_LPF14.5@178.475,136.15 U?_LPF15.1@72.475,146.75 U?_LPF15.2@177.525,146.75 U?_LPF15.3 U?_LPF15.4@70.575,144.15 U?_LPF15.5@178.475,144.15 X1.1.1 X1.1.3 X1.2.4 X1.2.6 X1.2.10 X1.S
copper on no net:
  other v1: -8.45,36.65 -7.15,36.65 -5.85,36.65 -4.55,36.65 -8.45,38 -7.15,38 -5.85,38 -4.55,38 -8.45,39.35 -7.15,39.35 -5.85,39.35 -4.55,39.35

## Other copper
Top:
  region: -1.2,50.175 -1.2,50.61 -1.9,50.61 -1.9,50.89 -1.2,50.89 -1.2,51.11 -1.9,51.11 -1.9,51.39 -1.2,51.39 -1.2,51.825 -1,51.825 1,51.825 1.2,51.825 1.2,51.39 1.9,51.39 1.9,51.11 1.2,51.11 1.2,50.89 1.9,50.89 1.9,50.61 1.2,50.61 1.2,50.175
  region net NetQ1_5: -9.45,19.925 -7.25,19.925 -7.25,23.915 -8.98,23.915 -8.98,23.255 -9.565,23.255 -9.565,22.745 -8.98,22.745 -8.98,20.335 -9.45,20.335 -9.45,19.925
  region net NetQ1_5: -4.55,19.925 -6.75,19.925 -6.75,23.915 -5.02,23.915 -5.02,23.255 -4.435,23.255 -4.435,22.745 -5.02,22.745 -5.02,20.335 -4.55,20.335 -4.55,19.925
  region: -1.45,57.7 -1.45,58.135 -2.15,58.135 -2.15,58.415 -1.45,58.415 -1.45,58.635 -2.15,58.635 -2.15,58.915 -1.45,58.915 -1.45,59.35 -1.25,59.35 0.75,59.35 0.95,59.35 0.95,58.915 1.65,58.915 1.65,58.635 0.95,58.635 0.95,58.415 1.65,58.415 1.65,58.135 0.95,58.135 0.95,57.7
  region net Out1: 67.61,9.6 67.61,8.4 cw(c67.56,8.4) 67.56,8.35 67.31,8.35 ccw(c67.31,8.3) 67.26,8.3 67.26,8.085 cw(c67.21,8.085) 67.21,8.035 65.11,8.035 cw(c65.11,8.085) 65.06,8.085 65.06,9.915 cw(c65.11,9.915) 65.11,9.965 67.21,9.965 cw(c67.21,9.915) 67.26,9.915 67.26,9.7 ccw(c67.31,9.7) 67.31,9.65 67.56,9.65 cw(c67.56,9.6)

## Silkscreen, mask and mechanical layers (free items; w line width, h text height)
Board:
  lines w0.1: -32.975,56.172 68.625,56.172
  lines w0.254: -32.975,26.897 -23.969,26.897 -23.969,18.898 65.625,18.897 65.625,55.172 ; -32.975,85.447 -23.969,85.447 -23.969,93.448 65.625,93.447 65.625,57.172 ; -32.975,14.897 -32.975,97.447 62.156,97.447 68.625,90.979 68.625,57.172 58.625,57.172 58.625,55.172 68.625,55.172 68.625,21.467 62.055,14.897 -32.975,14.897